# Altium PCB PCB.PcbDoc
Units mil, origin at the board's own origin, x right, y up, seen from the top; angles counter-clockwise.
Board outline 3543.31 x 954.33 mil, 2 copper layers (Top Layer, Bottom Layer); 3 components, 4 nets, 11 pads, 0 vias.
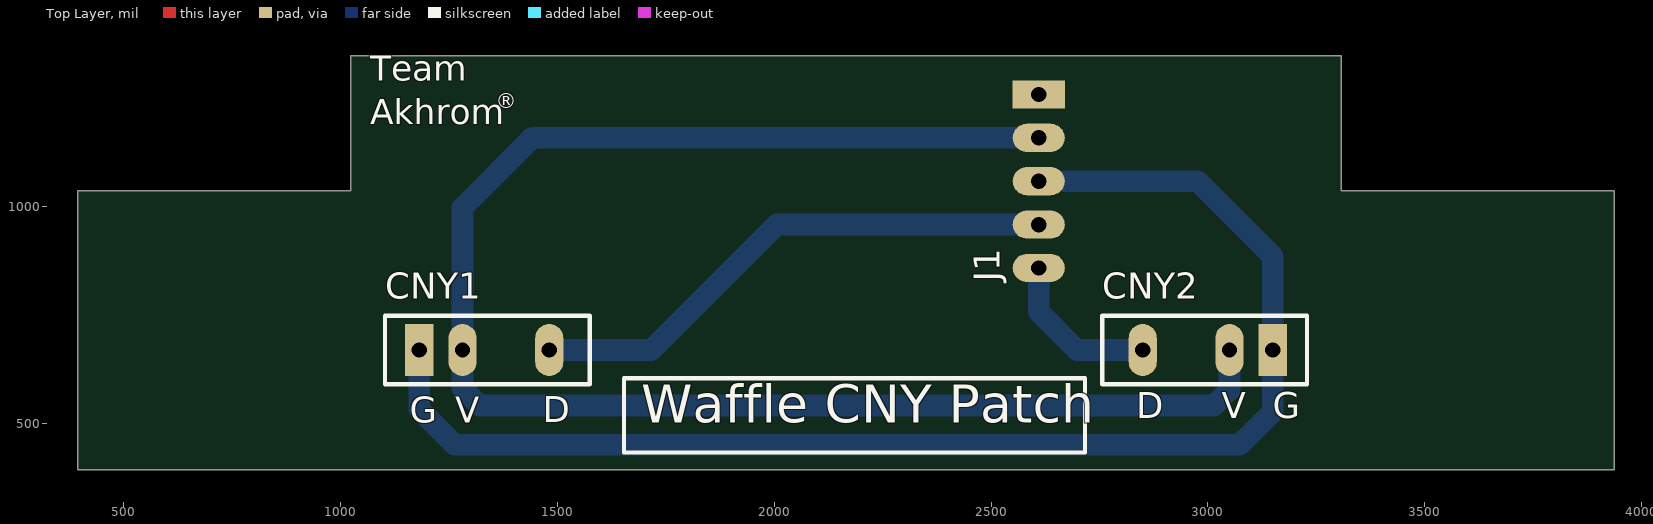
[diagram p0: Top Layer view]
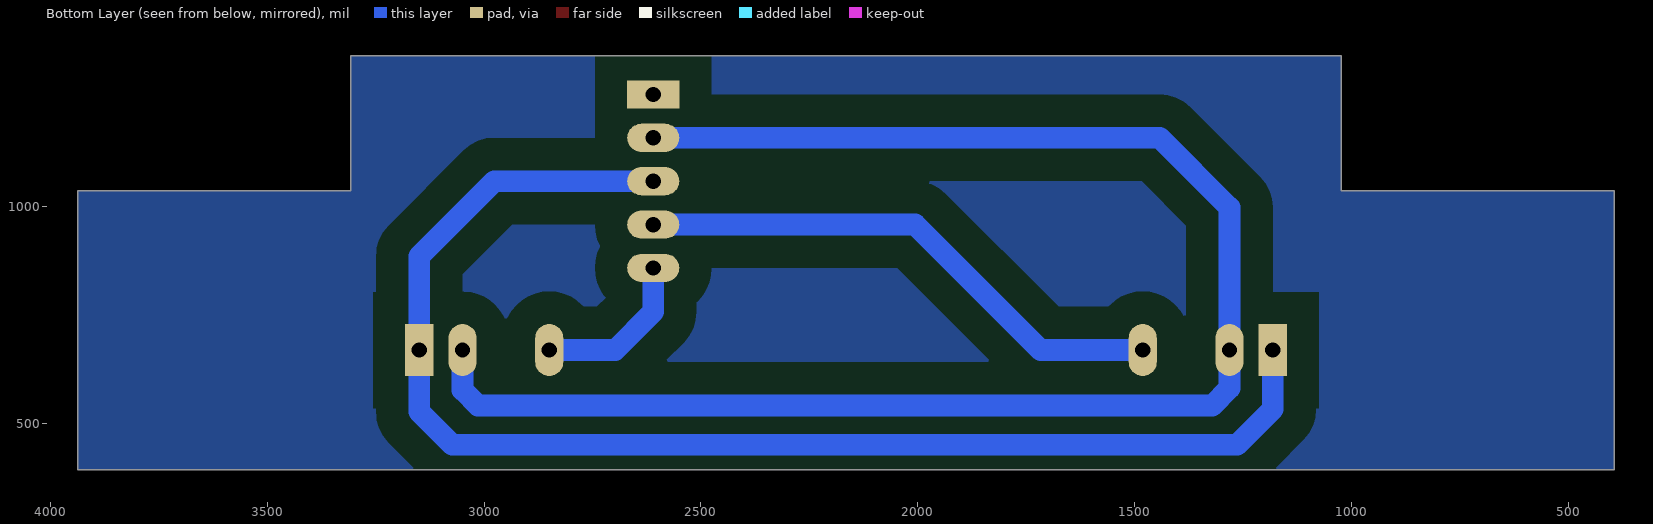
[diagram p1: Bottom Layer view, seen from below]
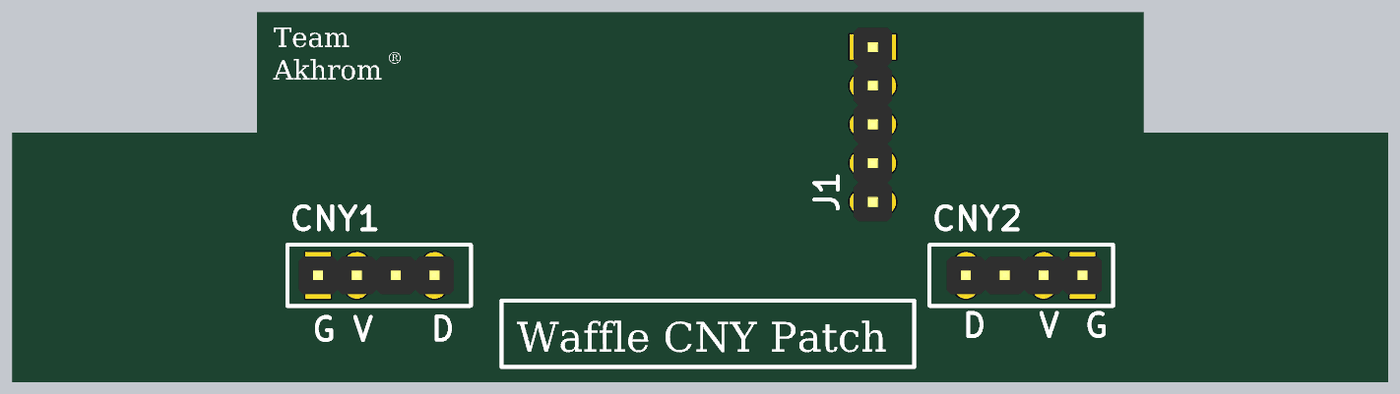
[diagram p2: 3D render of the assembled board from above, using the file's embedded part models]

## Layer stack, top to bottom
Top Solder: solder mask 0.4, Solder Resist, Dk 3.5
Top Layer: signal copper 1.4
Dielectric 1: dielectric 12.6, FR-4, Dk 4.8
Bottom Layer: signal copper 1.4
Bottom Solder: solder mask 0.4, Solder Resist, Dk 3.5

## Board outline
393.7,393.7 393.7,1037.01 1023.62,1037.01 1023.62,1348.03 3307.09,1348.03 3307.09,1037.01 3937.01,1037.01 3937.01,393.7

## Design rules (kind name [scope] priority, off if disabled: settings)
Clearance [All] p1: gap=30 except(75: Arc-Poly Track-Poly SMDPad-Poly THPad-Poly Via-Poly Fill-Poly Poly-Poly Poly-Region Poly-Text)
PlaneConnect [All] p1: planeconnectstyle=Relief reliefexpansion=20 reliefentries=4 reliefconductorwidth=30 reliefairgap=30
PolygonConnect [All] p1: connectstyle=Relief reliefconductorwidth=50 reliefentries=4 polygonreliefangle="90 Angle" airgapwidth=30
RoutingVias [All] p1: holewidth=28 width=50 viastyle="Through Hole" minholewidth=28 minwidth=50 maxholewidth=28 maxwidth=50
SolderMaskExpansion [All] p1: expansion=4
Width [All] p1: maxlimit=50 minlimit=30 preferedwidth=30
29 further rules are at their usual default settings.

## Components (designator, comment, footprint, x,y, rotation, side; value= is the part's Value field where it differs from the comment)
CNY1 "CNY_HEADER" CNY_HEADER 1331.1,669.29 r90 top
CNY2 "CNY_HEADER" CNY_HEADER 2999.61,669.29 r270 top
J1 "PICkit" "Header 1x5" 2609.84,1258.66 r0 top

## Footprints (in the part's own frame and the unit in brackets; to place one, negate y for a bottom-side part, rotate by r counter-clockwise, add the part's x,y. Pads: shape width x height; smd on the part's side, far side on the other; paste and mask are expansions set on the pad)
CNY_HEADER [mil]
  rect 120x65 hole 35.43: 1(0,150)
  oval 120x65 hole 35.43: 2(0,50) 3(0,-150)
  body extent -49,-200 49,200, height 336
"Header 1x5" [mil]
  rect 120x65 hole 35.43: 1(0,0)
  oval 120x65 hole 35.43: 2(0,-100) 3(0,-200) 4(0,-300) 5(0,-400)
  body extent -49,-450 49,50, height 336

## Nets (pads, with @x,y where several pads share a name; then routed paths per layer and width w, separated by ;. In a path a pad name is that pad's centre, name@x,y a point inside that pad or via, vN(x,y) a via of type N, cw(c..) or ccw(c..) an arc to the next point about the centre after c; other vN are vias at no path point)
CNY1: CNY1.3 J1.4 | length 1248.6
  Bottom Layer w50: CNY1.3 1716.54,669.29 2005.91,958.66 J1.4
CNY2: CNY2.3 J1.5 | length 377.5
  Bottom Layer w50: J1.5 2609.84,757.48 2698.03,669.29 CNY2.3
GND: CNY1.1 CNY2.1 J1.3 | length 3139.9
  Bottom Layer w50: CNY1.1 1181.1,533.07 1262.99,451.18 3073.62,451.18 3149.61,527.17 CNY2.1 3149.61,885.43 2976.38,1058.66 J1.3
VCC: CNY1.2 CNY2.2 J1.2 | length 3704.1
  Bottom Layer w50: J1.2 1441.73,1158.66 1281.1,998.03 CNY1.2 1281.1,581.1 1320.87,541.34 3013.78,541.34 3049.61,577.17 CNY2.2
pads on no net: J1.1

## Polygon pours and split planes (outlines as drawn)
no net on Bottom Layer "Top Layer-No Net" (solid, pour order 2): 393.7,393.7 393.7,1037.01 1023.62,1037.01 1023.62,1348.03 3307.09,1348.03 3307.09,1037.01 3937.01,1037.01 3937.01,393.7

## Silkscreen, mask and mechanical layers (free items; w line width, h text height)
Top Overlay:
  lines w10: 1102.36,590.55 1102.36,748.03 1574.8,748.03 1574.8,590.55 1102.36,590.55 ; 1653.54,433.07 1653.54,603.94 2716.54,603.94 2716.54,433.07 1653.54,433.07 ; 2755.91,590.55 3228.35,590.55 3228.35,748.03 2755.91,748.03 2755.91,590.55
  text "®" at 1357.87,1215.35 h60
  text "Team / Akhrom" at 1068.5,1170.47 h100
  text "D" at 2834.65,511.81 h60
  text "V" at 3031.5,511.81 h60
  text "G" at 3149.61,511.81 h60
  text "D" at 1465.75,502.76 h60
  text "G" at 1159.84,501.57 h60
  text "V" at 1264.57,501.57 h60
  text "Waffle CNY Patch" at 1692.91,472.44 h150
Mechanical 1:
  the board outline again, w10